# EAGLE board spear (EAGLE 6.4)
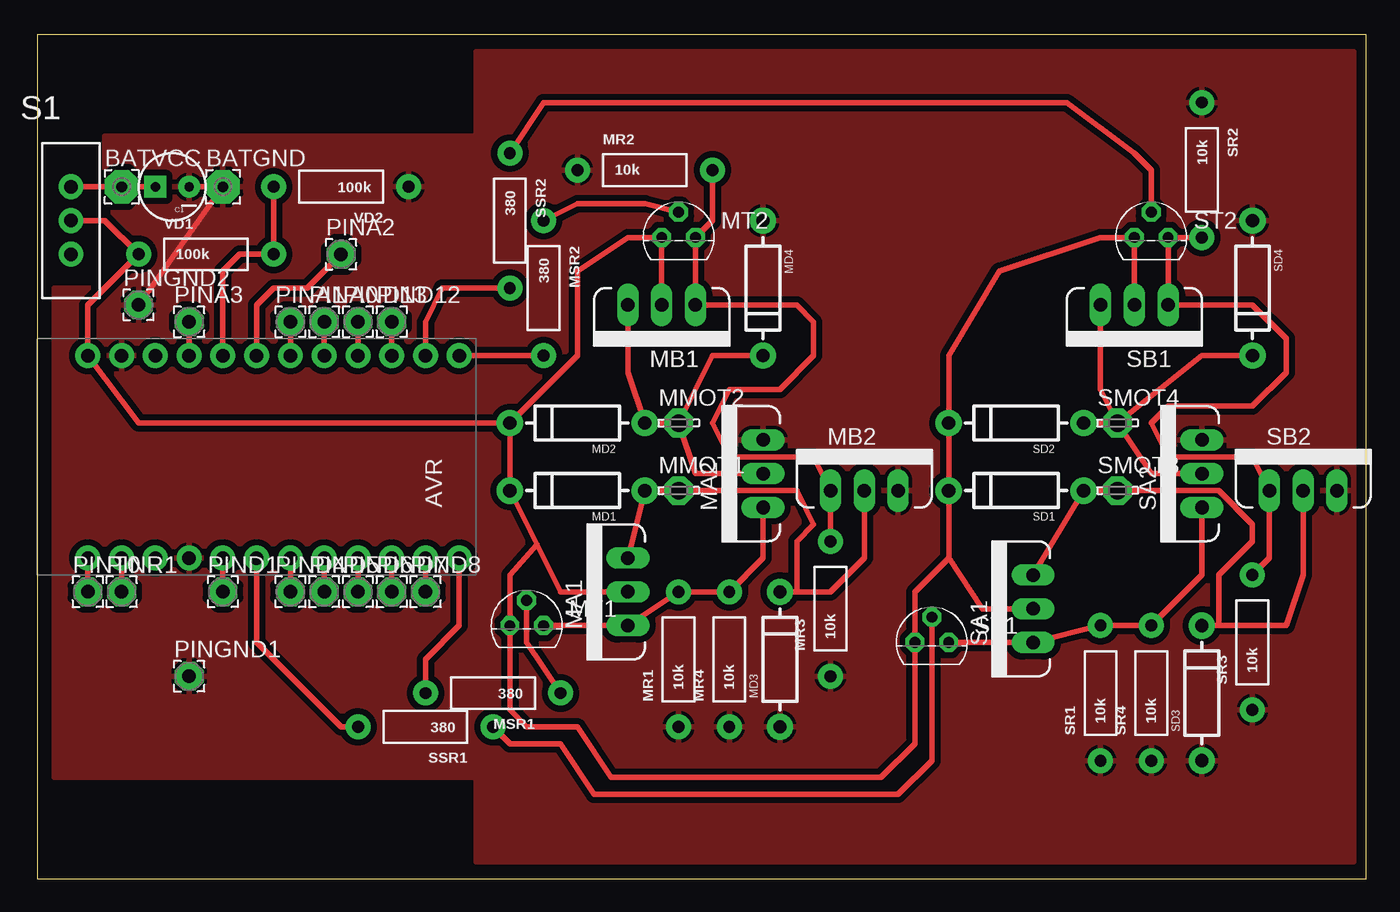
[diagram p0: board, top side]
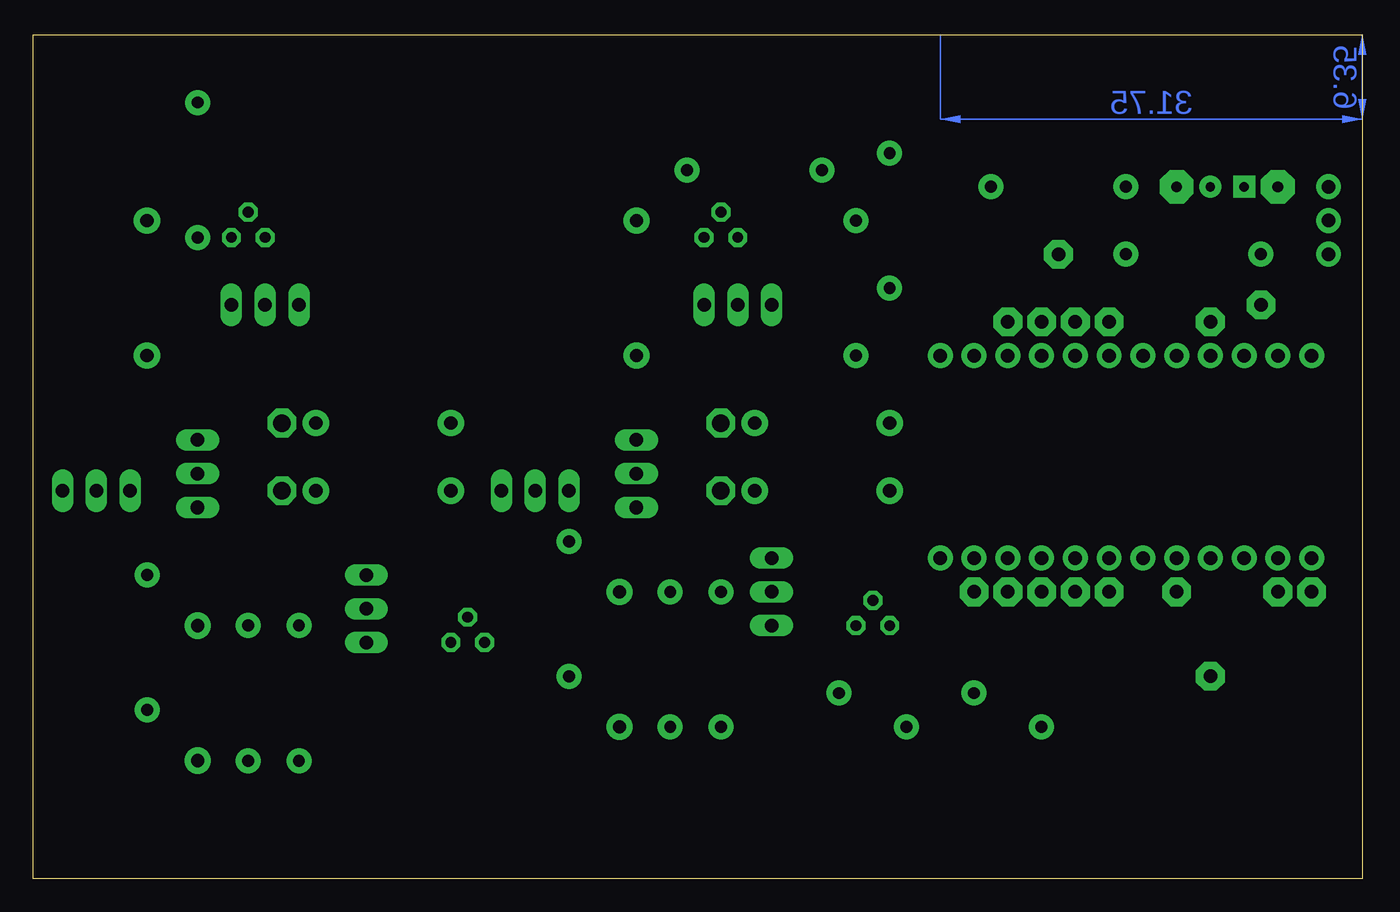
[diagram p1: board, bottom side, seen from below]

Size 100 x 63.5 mm. Coordinates in mm from the lower left corner, seen from the top.
Outline: 0,0 100,0 100,63.5 0,63.5 0,0
Copper layers (1*16): Top 0.035mm / dielectric 1.5mm / Bottom 0.035mm
Design rules "SparkFun *": minimum track width 16mil, minimum drill 20mil, track to track 12mil, track to pad 12mil, pad to pad 12mil, via to via 8mil, smd to smd 8mil, copper to edge 16mil, drill to drill 16mil, minimum pad ring 12mil, minimum via ring 10mil, stop-mask expansion 4mil, vias tented up to drill 25mil, thermal gap 10mil
Net classes: 0 default: width 0.457 mm, drill 0.457 mm, clearance 0.457 mm
tRestrict: area 0,57.2 to 31.8,63.5; area 0,0 to 31.8,6.3

## Footprints (pad centres in the part's own frame; a part is rotated, then mirrored left to right if it is on the bottom)
ARDUINO_MINI = drill 1.016 pad 1.88: 1 -7.62,12.7; 2 -7.62,10.16; 3 -7.62,7.62; 4 -7.62,5.08; 5 -7.62,2.54; 6 -7.62,0; 7 -7.62,-2.54; 8 -7.62,-5.08; 9 -7.62,-7.62; 10 -7.62,-10.16; 11 -7.62,-12.7; 12 -7.62,-15.24; 13 7.62,-15.24; 14 7.62,-12.7; 15 7.62,-10.16; 16 7.62,-7.62; 17 7.62,-5.08; 18 7.62,-2.54; 19 7.62,0; 20 7.62,2.54; 21 7.62,5.08; 22 7.62,7.62; 23 7.62,10.16; 24 7.62,12.7
2,54/0,8 = drill 0.813 pad 2.54 octagon: 1 0,0
CPOL-RADIAL-10UF-25V = drill 0.7 pad 1.651 square: 1 1.27,0 | drill 0.7 pad 1.651: 2 -1.27,0
TO220V = drill 1.016 long: 1 -2.54,0; 2 0,0; 3 2.54,0
DIODE-1N4001 = drill 1 pad 1.981: A -5.08,0; C 5.08,0
LSP13 = drill 1.321 pad 2.159 octagon: MP 0,0
AXIAL-0.4 = drill 0.9 pad 1.88: P$1 -5.08,0; P$2 5.08,0
TO92 = drill 0.813 octagon: 1 1.27,0; 2 0,1.905; 3 -1.27,0
2,15/1,0 = drill 1.016 pad 2.159 octagon: 1 0,0
SWITCH-SPDT = drill 1.016 pad 1.88: 1 0,2.54; 2 0,0; 3 0,-2.54

## Placement (x,y rotation side)
AVR  ARDUINO_MINI  [ARDUINO_MINI]  16.51,31.75 90 top
BATGND  WIREPAD2,54/0,8  [2,54/0,8]  13.97,52.07 0 top
BATVCC  WIREPAD2,54/0,8  [2,54/0,8]  6.35,52.07 0 top
C1  10uf  [CPOL-RADIAL-10UF-25V]  10.16,52.07 180 top
MA1  MOSFET-NCHANNELFQP30N06L  [TO220V]  44.45,21.59 90 top
MA2  MOSFET-NCHANNELFQP30N06L  [TO220V]  54.61,30.48 90 top
MB1  MOSFET-NCHANNELFQP30N06L  [TO220V]  46.99,43.18 180 top
MB2  MOSFET-NCHANNELFQP30N06L  [TO220V]  62.23,29.21 0 top
MD1  [DIODE-1N4001]  40.64,29.21 180 top
MD2  [DIODE-1N4001]  40.64,34.29 180 top
MD3  [DIODE-1N4001]  55.88,16.51 90 top
MD4  [DIODE-1N4001]  54.61,44.45 270 top
MMOT1  LSP13  [LSP13]  48.26,29.21 0 top
MMOT2  LSP13  [LSP13]  48.26,34.29 0 top
MR1  10k  [AXIAL-0.4]  48.26,16.51 90 top
MR2  10k  [AXIAL-0.4]  45.72,53.34 0 top
MR3  10k  [AXIAL-0.4]  59.69,20.32 90 top
MR4  10k  [AXIAL-0.4]  52.07,16.51 90 top
MSR1  380  [AXIAL-0.4]  34.29,13.97 180 top
MSR2  380  [AXIAL-0.4]  38.1,44.45 270 top
MT1  2N3904  [TO92]  36.83,19.05 0 top
MT2  2N3904  [TO92]  48.26,48.26 0 top
PINA0  WIREPAD2,15/1,0  [2,15/1,0]  21.59,41.91 0 top
PINA1  WIREPAD2,15/1,0  [2,15/1,0]  19.05,41.91 0 top
PINA2  WIREPAD2,15/1,0  [2,15/1,0]  22.86,46.99 0 top
PINA3  WIREPAD2,15/1,0  [2,15/1,0]  11.43,41.91 0 top
PIND1  WIREPAD2,15/1,0  [2,15/1,0]  13.97,21.59 0 top
PIND4  WIREPAD2,15/1,0  [2,15/1,0]  19.05,21.59 0 top
PIND5  WIREPAD2,15/1,0  [2,15/1,0]  21.59,21.59 0 top
PIND6  WIREPAD2,15/1,0  [2,15/1,0]  24.13,21.59 0 top
PIND7  WIREPAD2,15/1,0  [2,15/1,0]  26.67,21.59 0 top
PIND8  WIREPAD2,15/1,0  [2,15/1,0]  29.21,21.59 0 top
PIND12  WIREPAD2,15/1,0  [2,15/1,0]  26.67,41.91 0 top
PIND13  WIREPAD2,15/1,0  [2,15/1,0]  24.13,41.91 0 top
PINGND1  WIREPAD2,15/1,0  [2,15/1,0]  11.43,15.24 0 top
PINGND2  WIREPAD2,15/1,0  [2,15/1,0]  7.62,43.18 0 top
PINR1  WIREPAD2,15/1,0  [2,15/1,0]  6.35,21.59 0 top
PINT0  WIREPAD2,15/1,0  [2,15/1,0]  3.81,21.59 0 top
S1  [SWITCH-SPDT]  2.54,49.53 0 top
SA1  MOSFET-NCHANNELFQP30N06L  [TO220V]  74.93,20.32 90 top
SA2  MOSFET-NCHANNELFQP30N06L  [TO220V]  87.63,30.48 90 top
SB1  MOSFET-NCHANNELFQP30N06L  [TO220V]  82.55,43.18 180 top
SB2  MOSFET-NCHANNELFQP30N06L  [TO220V]  95.25,29.21 0 top
SD1  [DIODE-1N4001]  73.66,29.21 180 top
SD2  [DIODE-1N4001]  73.66,34.29 180 top
SD3  [DIODE-1N4001]  87.63,13.97 90 top
SD4  [DIODE-1N4001]  91.44,44.45 270 top
SMOT3  LSP13  [LSP13]  81.28,29.21 0 top
SMOT4  LSP13  [LSP13]  81.28,34.29 0 top
SR1  10k  [AXIAL-0.4]  80.01,13.97 90 top
SR2  10k  [AXIAL-0.4]  87.63,53.34 270 top
SR3  10k  [AXIAL-0.4]  91.44,17.78 90 top
SR4  10k  [AXIAL-0.4]  83.82,13.97 90 top
SSR1  380  [AXIAL-0.4]  29.21,11.43 180 top
SSR2  380  [AXIAL-0.4]  35.56,49.53 270 top
ST1  2N3904  [TO92]  67.31,17.78 0 top
ST2  2N3904  [TO92]  83.82,48.26 0 top
VD1  100k  [AXIAL-0.4]  12.7,46.99 0 top
VD2  100k  [AXIAL-0.4]  22.86,52.07 180 top

## Library data of the parts
AVR = SparkFun-Boards
BATGND BATVCC PINA0 PINA1-PINA3 PIND1 PIND4-PIND8 PIND12 PIND13 PINGND1 PINGND2 PINR1 PINT0 = wirepad
C1 = SparkFun-Capacitors
MA1 MA2 MB1 MB2 SA1 SA2 SB1 SB2 = SparkFun-DiscreteSemi; PROD_ID: TRANS-10060
MD1-MD4 MR1-MR4 MSR1 MSR2 S1 SD1-SD4 SR1-SR4 SSR1 SSR2 VD1 VD2 = SparkFun
MMOT1 MMOT2 SMOT3 SMOT4 = solpad
MT1 MT2 ST1 ST2 = transistor

## Nets
GND: AVR.4 AVR.23 BATGND.1 C1.2 MA2.3 MB2.3 MD3.A MD4.A MR1.P$1 MR2.P$1 MR3.P$1 MR4.P$1 PINGND1.1 PINGND2.1 SA2.3 SB2.3 SD3.A SD4.A SR1.P$1 SR2.P$1 SR3.P$1 SR4.P$1 VD2.P$1
N$1: AVR.13 MSR2.P$2
N$2: AVR.12 MSR1.P$2
N$3: AVR.6 SSR1.P$2
N$4: AVR.14 SSR2.P$2
N$5: MB1.1 MB2.1 MR2.P$2 MR3.P$2 MT2.1
N$6: AVR.11 PIND8.1
N$7: MSR1.P$1 MT1.2
N$8: MSR2.P$1 MT2.2
N$9: MA1.3 MB2.2 MD1.A MD3.C MMOT1.MP
N$10: MA2.2 MB1.3 MD2.A MD4.C MMOT2.MP
N$12: SA1.1 SA2.1 SR1.P$2 SR4.P$2 ST1.1
N$13: MA1.1 MA2.1 MR1.P$2 MR4.P$2 MT1.1
N$14: AVR.10 PIND7.1
N$15: AVR.9 PIND6.1
N$16: SB1.1 SB2.1 SR2.P$2 SR3.P$2 ST2.1
N$17: AVR.8 PIND5.1
N$18: AVR.7 PIND4.1
N$20: AVR.15 PIND12.1
N$21: AVR.16 PIND13.1
N$22: SA2.2 SB1.3 SD2.A SD4.C SMOT4.MP
N$23: AVR.17 PINA0.1
N$24: SA1.3 SB2.2 SD1.A SD3.C SMOT3.MP
N$25: AVR.18 PINA1.1
N$26: AVR.19 PINA2.1
N$27: AVR.21 PINA3.1
N$28: BATVCC.1 C1.1 S1.1
N$29: AVR.5 PIND1.1
N$31: AVR.2 PINR1.1
N$32: AVR.1 PINT0.1
PINVCC: AVR.20 VD1.P$2 VD2.P$2
SSIG1: SSR1.P$1 ST1.2
SSIG2: SSR2.P$1 ST2.2
VCC: AVR.24 MA1.2 MB1.2 MD1.C MD2.C MT1.3 MT2.3 S1.2 SA1.2 SB1.2 SD1.C SD2.C ST1.3 ST2.3 VD1.P$1

## Tracks (layer width: path | path; a pad name or v marks a point on that pad's centre or on a via)
GND
  Top 0.406: C1.2 BATGND.1 PINGND2.1
  pour Top: 5.08,55.88 5.08,44.45 1.27,44.45 1.27,7.62 33.02,7.62 33.02,1.27 99.06,1.27 99.06,62.23 33.02,62.23 33.02,55.88
N$1
  Top 0.406: AVR.13 MSR2.P$2
N$2
  Top 0.406: AVR.12 31.75,19.05 29.21,16.51 MSR1.P$2
N$3
  Top 0.406: AVR.6 16.51,17.78 22.86,11.43 SSR1.P$2
N$4
  Top 0.406: SSR2.P$2 30.48,44.45 29.21,41.91 AVR.14
N$5
  Top 0.406: MR2.P$2 50.8,49.53 MT2.1 MB1.1 57.15,43.18 58.42,41.91 58.42,39.37 55.88,36.83 52.07,36.83 50.8,34.29 52.07,31.75 58.42,31.75 MB2.1 MR3.P$2
N$6
  Top 0.406: AVR.11 PIND8.1
N$7
  Top 0.406: MT1.2 36.83,17.78 MSR1.P$1
N$8
  Top 0.406: MSR2.P$1 40.64,50.8 45.72,50.8 MT2.2
N$9
  Top 0.406: MA1.3 MD1.A MMOT1.MP 57.15,29.21 58.42,26.67 57.15,25.4 57.15,21.59 | MD3.C 57.15,21.59 | 57.15,21.59 59.69,21.59 62.23,24.13 MB2.2
N$10
  Top 0.406: MB1.3 44.45,38.1 MD2.A MMOT2.MP | MA2.2 49.53,30.48 MMOT2.MP | MD4.C 50.8,39.37 MMOT2.MP
N$12
  Top 0.406: ST1.1 SA1.1 SR1.P$2 SR4.P$2 87.63,22.86 SA2.1
N$13
  Top 0.406: MT1.1 MA1.1 MR1.P$2 MR4.P$2 54.61,24.13 MA2.1
N$14
  Top 0.406: AVR.10 PIND7.1
N$15
  Top 0.406: AVR.9 PIND6.1
N$16
  Top 0.406: SR2.P$2 ST2.1 SB1.1 91.44,43.18 93.98,40.64 93.98,38.1 91.44,35.56 85.09,35.56 83.82,34.29 85.09,31.75 91.44,31.75 SB2.1 92.71,24.13 SR3.P$2
N$17
  Top 0.406: AVR.8 PIND5.1
N$18
  Top 0.406: AVR.7 PIND4.1
N$20
  Top 0.406: PIND12.1 AVR.15
N$21
  Top 0.406: PIND13.1 AVR.16
N$22
  Top 0.406: SB1.3 80.01,36.83 SMOT4.MP | SMOT4.MP SD2.A | SA2.2 83.82,30.48 SMOT4.MP | SD4.C 87.63,39.37 SMOT4.MP
N$23
  Top 0.406: PINA0.1 AVR.17
N$24
  Top 0.406: SA1.3 SD1.A SMOT3.MP 88.9,29.21 91.44,26.67 91.44,25.4 88.9,22.86 88.9,19.05 | SD3.C 88.9,19.05 | SB2.2 95.25,22.86 93.98,19.05 88.9,19.05
N$25
  Top 0.406: PINA1.1 AVR.18
N$26
  Top 0.406: AVR.19 16.51,43.18 17.78,44.45 20.32,44.45 PINA2.1
N$27
  Top 0.406: PINA3.1 AVR.21
N$28
  Top 0.406: S1.1 BATVCC.1 C1.1
N$29
  Top 0.406: AVR.5 PIND1.1
N$31
  Top 0.406: AVR.2 PINR1.1
N$32
  Top 0.406: AVR.1 PINT0.1
PINVCC
  Top 0.406: VD2.P$2 VD1.P$2 15.24,46.99 13.97,45.72 AVR.20
SSIG1
  Top 0.406: ST1.2 67.31,8.89 64.77,6.35 41.91,6.35 39.37,10.16 35.56,10.16 SSR1.P$1
SSIG2
  Top 0.406: ST2.2 83.82,53.34 82.55,54.61 77.47,58.42 38.1,58.42 SSR2.P$1
VCC
  Top 0.406: S1.2 5.08,49.53 VD1.P$1 3.81,43.18 AVR.24 7.62,34.29 MD2.C | MD2.C MD1.C 37.59,25.15 | MB1.2 MT2.3 44.45,48.26 40.64,45.72 40.64,39.37 MD2.C | MA1.2 39.37,21.59 37.59,25.15 | 37.59,25.15 35.56,22.86 MT1.3 35.56,12.7 36.83,11.43 40.64,11.43 43.18,7.62 63.5,7.62 66.04,10.16 ST1.3 66.04,21.59 68.58,24.13 | 68.58,24.13 SD1.C SD2.C 68.58,39.37 72.39,45.72 80.01,48.26 ST2.3 SB1.2 | SA1.2 71.12,20.32 68.58,24.13
(copper drawn outside any net)
  shapes: Bottom area x2